# EAGLE board control_unit (EAGLE 8.4.3)
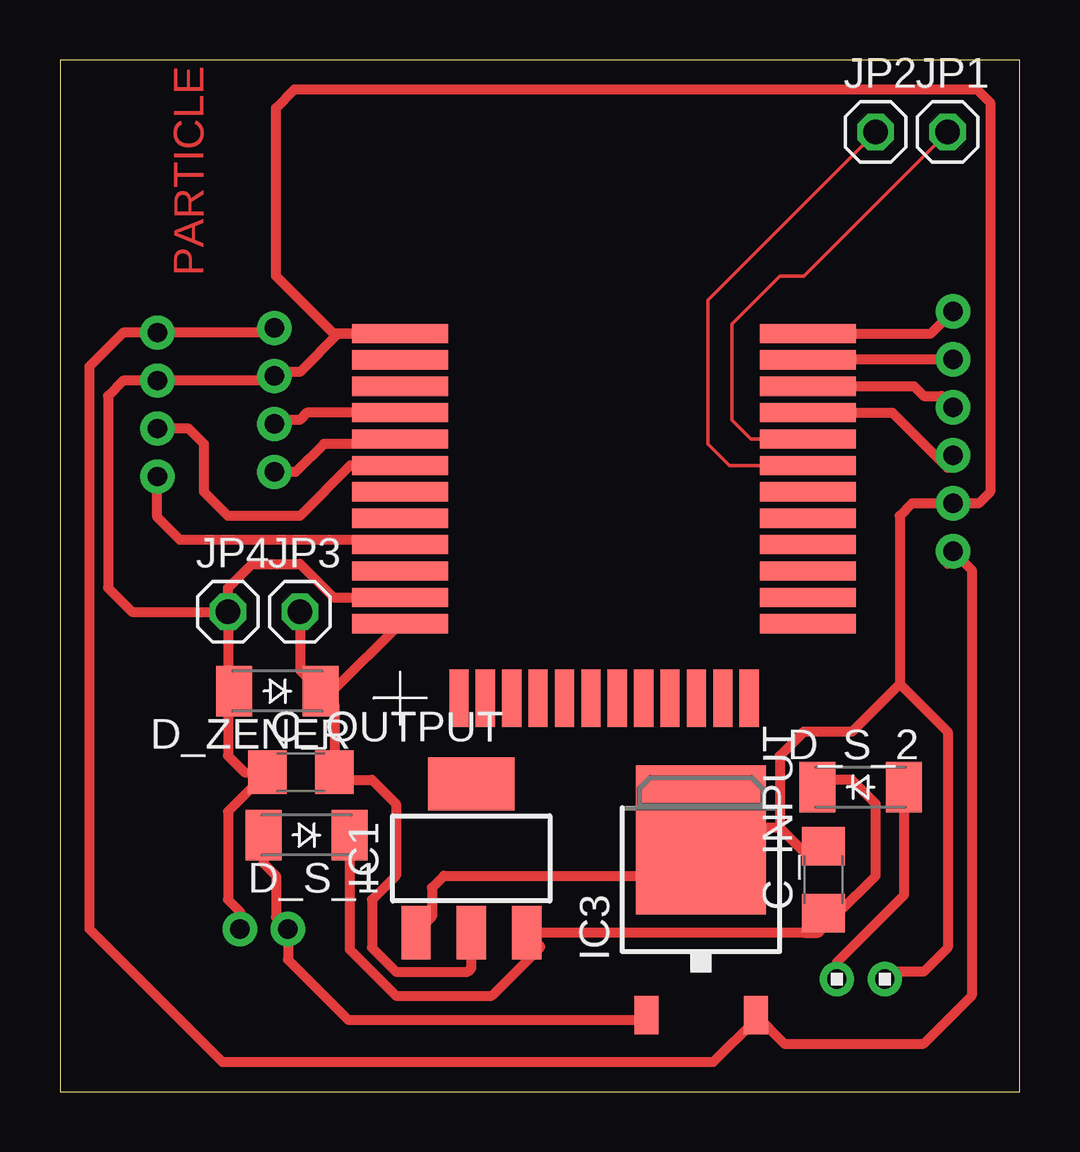
[diagram p0: board, top side]
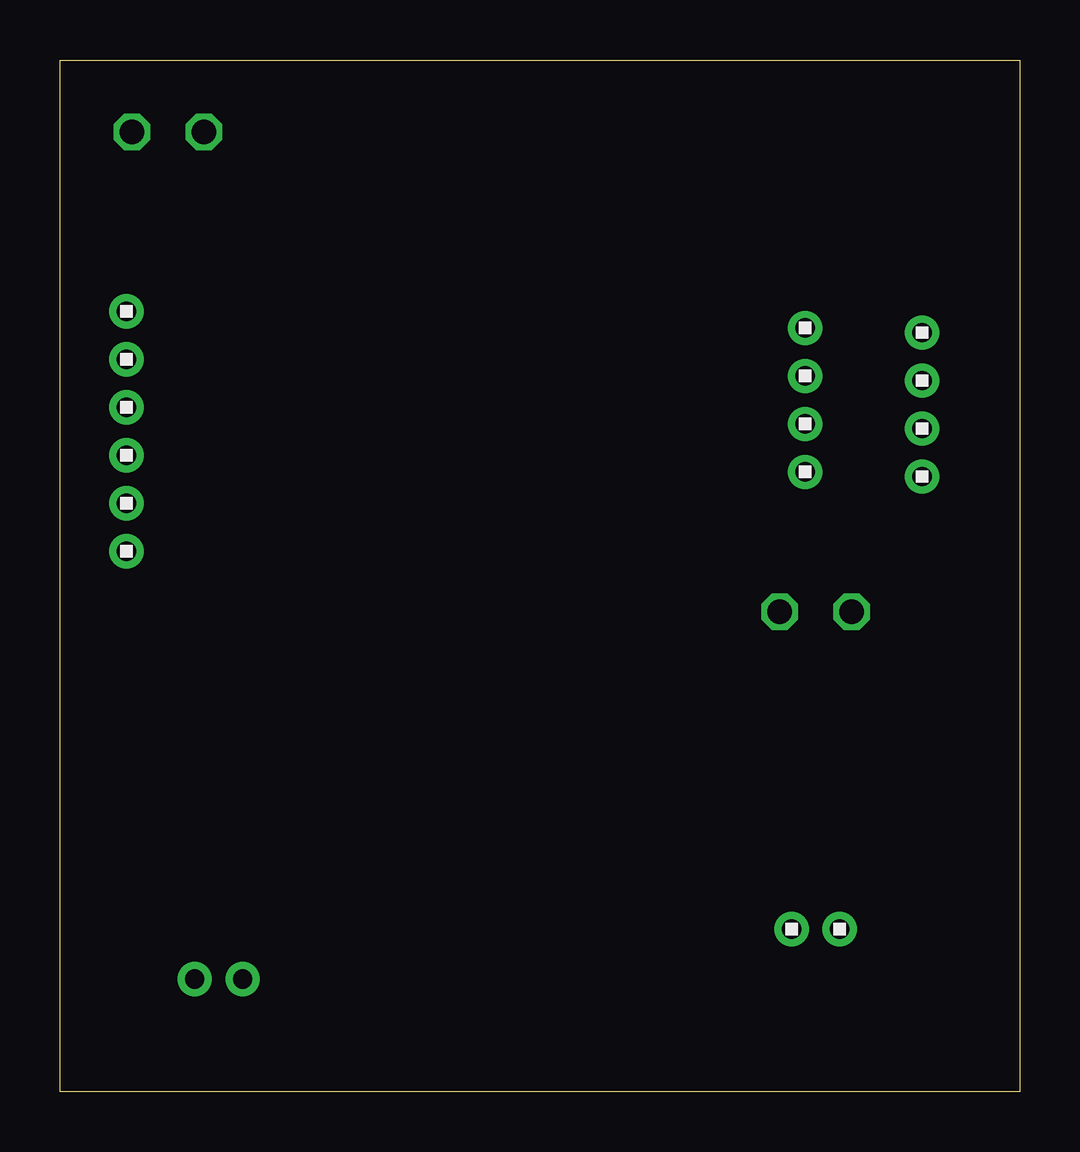
[diagram p1: board, bottom side, seen from below]

Size 40 x 43 mm. Coordinates in mm from the lower left corner, seen from the top.
Outline: 0,0 40,0 40,43 0,43 0,0
Copper layers (1*16): Top 0.035mm / dielectric 1.5mm / Bottom 0.035mm
Design rules "default": minimum track width 6mil, minimum drill 0.35mm, track to track 6mil, track to pad 6mil, pad to pad 6mil, via to via 6mil, smd to smd 6mil, copper to edge 40mil, drill to drill 6mil, minimum pad ring 10mil, minimum via ring 8mil, stop-mask expansion 4mil, vias tented up to drill 0mil, thermal gap 10mil

## Footprints (pad centres in the part's own frame; a part is rotated, then mirrored left to right if it is on the bottom)
1X4 = drill 0.8 pad 1.422: 1 0,0; 2 2,0; 3 4,0; 4 6,0
1X6 = drill 0.8 pad 1.422: 1 0,0; 2 2,0; 3 4,0; 4 6,0; 5 8,0; 6 10,0
C1206 = smd 1.6 x 1.8: 1 -1.4,0; 2 1.4,0
SOD-123_MINI-SMA = smd 1.5 x 2.1: A 1.8,0; C -1.8,0
SOT223 = smd 1.219 x 2.235: 1 -2.311,-3.099; 2 0,-3.099; 3 2.311,-3.099 | smd 3.6 x 2.2: TAB 0,3.099
TO252 = smd 1 x 1.6: 1 -2.28,-4.8; 2 2.28,-4.8 | smd 5.4 x 6.2: 3 0,2.5
1X01 = drill 1.016 octagon: 1 0,0
1X2 = drill 0.8 pad 1.422: 1 0,0; 2 2,0
SMD_PAD_VERSION = smd 4 x 0.8: P$01 0,15.2; P$02 0,14.1; P$03 0,13; P$04 0,11.9; P$05 0,10.8; P$06 0,9.7; P$07 0,8.6; P$08 0,7.5; P$09 0,6.4; P$10 0,5.3; P$11 0,4.2; P$12 0,3.1; P$25 17,3.1; P$26 17,4.2; P$27 17,5.3; P$28 17,6.4; P$29 17,7.5; P$30 17,8.6; P$31 17,9.7; P$32 17,10.8; P$33 17,11.9; P$34 17,13; P$35 17,14.1; P$36 17,15.2 | smd 0.8 x 2.4: P$13 2.45,0; P$14 3.55,0; P$15 4.65,0; P$16 5.75,0; P$17 6.85,0; P$18 7.95,0; P$19 9.05,0; P$20 10.15,0; P$21 11.25,0; P$22 12.35,0; P$23 13.45,0; P$24 14.55,0

## Placement (x,y rotation side)
2_DEVICE_TERMINAL  1X4  [1X4]  8.94,31.83 270 bottom
4_DEVICE_TERMINAL  1X6  [1X6]  37.23,22.52 90 bottom
C_INPUT  [C1206]  31.82,8.83 90 top
C_OUTPUT  [C1206]  10.04,13.31 0 top
D_S_1  CGRM4001-G  [SOD-123_MINI-SMA]  10.28,10.69 180 top
D_S_2  CGRM4001-G  [SOD-123_MINI-SMA]  33.37,12.69 0 top
D_ZENER  CGRM4001-G  [SOD-123_MINI-SMA]  9.07,16.69 180 top
IC1  LM1117MPX-5.0  [SOT223]  17.15,9.72 0 top
IC3  7808DT  [TO252]  26.72,7.99 0 top
JP1  [1X01]  37,40 0 top
JP2  [1X01]  34,40 0 top
JP3  [1X01]  10,20 0 top
JP4  [1X01]  7,20 0 top
SPEED_TERMINAL  1X4  [1X4]  4.06,31.63 270 bottom
SUPPLY_1  1X2  [1X2]  9.5,6.77 0 bottom
SUPPLY_2  1X2  [1X2]  32.39,4.69 0 top
U$1  HZX_MODULE  [SMD_PAD_VERSION]  14.18,16.4 0 top

## Library data of the parts
2_DEVICE_TERMINAL 4_DEVICE_TERMINAL SPEED_TERMINAL SUPPLY_1 SUPPLY_2 = headers(2mm)(samtec)
C_INPUT C_OUTPUT = resistor
D_S_1 D_S_2 D_ZENER = diode
IC1 = lm1117
IC3 = linear
JP1-JP4 = pinhead
U$1 = HZX_MODULE; AUTHOR: Agam

## Nets
3.3V: C_OUTPUT.2 D_ZENER.C IC1.2 JP3.1 U$1.P$12
5V: 2_DEVICE_TERMINAL.1 4_DEVICE_TERMINAL.1 IC3.2 SPEED_TERMINAL.1
CLK: JP1.1 U$1.P$32
DIO: JP2.1 U$1.P$31
GND: 2_DEVICE_TERMINAL.2 4_DEVICE_TERMINAL.2 C_INPUT.2 C_OUTPUT.1 D_ZENER.A IC1.1 IC3.3 JP4.1 SPEED_TERMINAL.2 SUPPLY_1.2 SUPPLY_2.2 U$1.P$01 U$1.P$11
IN28: SPEED_TERMINAL.4 U$1.P$09
N$2: D_S_1.A IC3.1 SUPPLY_1.1
N$3: C_INPUT.1 D_S_1.C D_S_2.C IC1.3
N$6: D_S_2.A SUPPLY_2.1
O17: 4_DEVICE_TERMINAL.3 U$1.P$33
O18: 4_DEVICE_TERMINAL.4 U$1.P$34
O19: 4_DEVICE_TERMINAL.5 U$1.P$35
O20: 4_DEVICE_TERMINAL.6 U$1.P$36
O21: U$1.P$02
O22: U$1.P$03
O23: 2_DEVICE_TERMINAL.3 U$1.P$04
O24: 2_DEVICE_TERMINAL.4 U$1.P$05
O25: SPEED_TERMINAL.3 U$1.P$06
O26: U$1.P$07
O27: U$1.P$08
O29: U$1.P$10

## Tracks (layer width: path | path; a pad name or v marks a point on that pad's centre or on a via)
3.3V
  Top 0.406: U$1.P$12 11.37,16.69 D_ZENER.C | D_ZENER.C 11.44,16.12 C_OUTPUT.2 11.75,13 13,13 14,12 14,9 13,8 13,6 14,5 17,5 17.15,5.15 IC1.2 | JP3.1 10,17.56 D_ZENER.C
5V
  Top 0.406: 37,22 37.23,22.23 4_DEVICE_TERMINAL.1 38,21.75 38,4 36,2 30.19,2 IC3.2 29,3 27.22,1.22 6.78,1.22 2.5,5.5 | 2_DEVICE_TERMINAL.1 8.74,31.63 SPEED_TERMINAL.1 2.63,31.63 1.22,30.22 1.22,6.78 2.5,5.5 | 2.5,5.5 2,6
CLK
  Top 0.152: JP1.1 31,34 30,34 28,32 28,28 28.8,27.2 U$1.P$32
DIO
  Top 0.152: JP2.1 27,33 27,27 27.9,26.1 U$1.P$31
GND
  Top 0.406: U$1.P$11 11.4,20.6 10,22 8,22 7,21 JP4.1 | JP4.1 7,16.96 D_ZENER.A 7,16.42 7,14 7.69,13.31 C_OUTPUT.1 7,11.67 7,8 7.5,7.5 SUPPLY_1.2 | 35,17 35,24 35.52,24.52 4_DEVICE_TERMINAL.2 38.3,24.52 38.78,25 38.78,41.22 38.22,41.78 9.78,41.78 9,41 9,34 11.4,31.6 U$1.P$01 11.6,31.6 10,30 9.11,30 2_DEVICE_TERMINAL.2 8.74,29.63 SPEED_TERMINAL.2 2.63,29.63 2,29 2,21 3,20 JP4.1 | 35,17 33,15 31,15 30,14 30,11 | 30,11 31,10 31.59,10 C_INPUT.2 | 30,11 28,11 26.72,12.28 | 26.72,12.28 26,13 | 26.72,12.28 IC3.3 25.23,9 16,9 15.5,8.5 15.5,7.28 IC1.1 | 35,17 37,15 37,6 36,5 34.7,5 SUPPLY_2.2
IN28
  Top 0.406: U$1.P$09 13.98,23 5,23 4.06,23.94 SPEED_TERMINAL.4
N$2
  Top 0.406: IC3.1 24.25,3 12,3 9.5,5.5 SUPPLY_1.1 9,7.27 9,9 8.48,9.52 D_S_1.A
N$3
  Top 0.406: D_S_1.C 12.08,5.92 14,4 18,4 20,6 20,6.08 IC1.3 31,6.62 | 31,6.62 31.62,6.62 32,7 | D_S_2.C 31.88,13 33,13 34,12 34,9 32.43,7.43 C_INPUT.1 31.81,7.43 31,6.62
N$6
  Top 0.406: D_S_2.A 35.17,8.17 32.39,5.39 SUPPLY_2.1
O17
  Top 0.406: U$1.P$33 34.7,28.3 37,26 37.23,26.23 4_DEVICE_TERMINAL.3
O18
  Top 0.406: U$1.P$34 35.6,29.4 36,29 36.75,29 4_DEVICE_TERMINAL.4
O19
  Top 0.406: 4_DEVICE_TERMINAL.5 31.2,30.52 U$1.P$35
O20
  Top 0.406: U$1.P$36 36.31,31.6 4_DEVICE_TERMINAL.6
O23
  Top 0.406: U$1.P$04 10.3,28.3 10,28 9.11,28 2_DEVICE_TERMINAL.3
O24
  Top 0.406: U$1.P$05 13.98,27 11,27 9.83,25.83 2_DEVICE_TERMINAL.4
O25
  Top 0.406: U$1.P$06 12.1,26.1 10,24 7,24 6,25 6,27 5.37,27.63 SPEED_TERMINAL.3

## Text on the board
Top: PARTICLE